# Altium PCB NavMergeBoardR2.PcbDoc
Units mil, origin at the board's own origin, x right, y up, seen from the top; angles counter-clockwise.
Board outline 3460 x 2717 mil, 4 copper layers (Top Layer, Internal Plane 1, Internal Plane 2, Bottom Layer), stack 30.634 mil thick; 103 components, 93 nets, 472 pads, 121 vias.
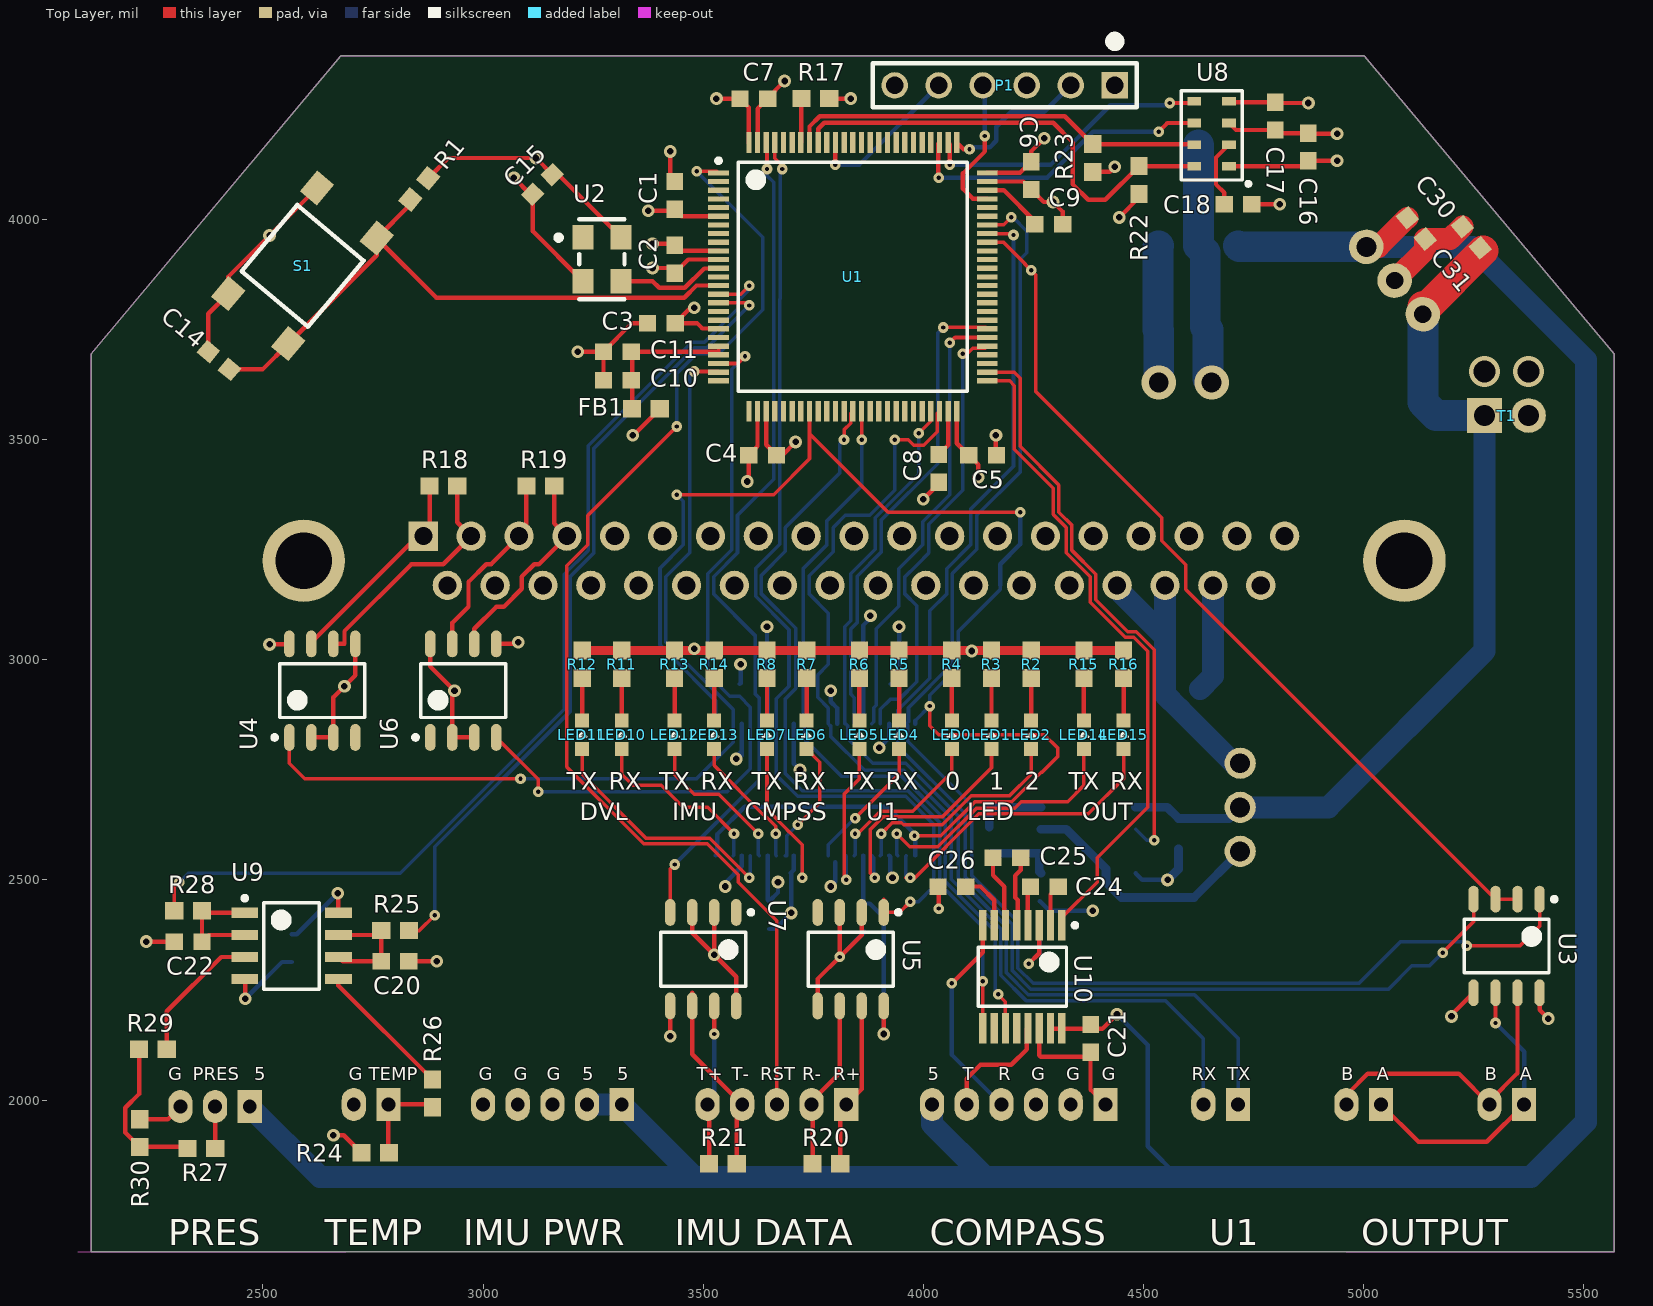
[diagram p0: Top Layer view]
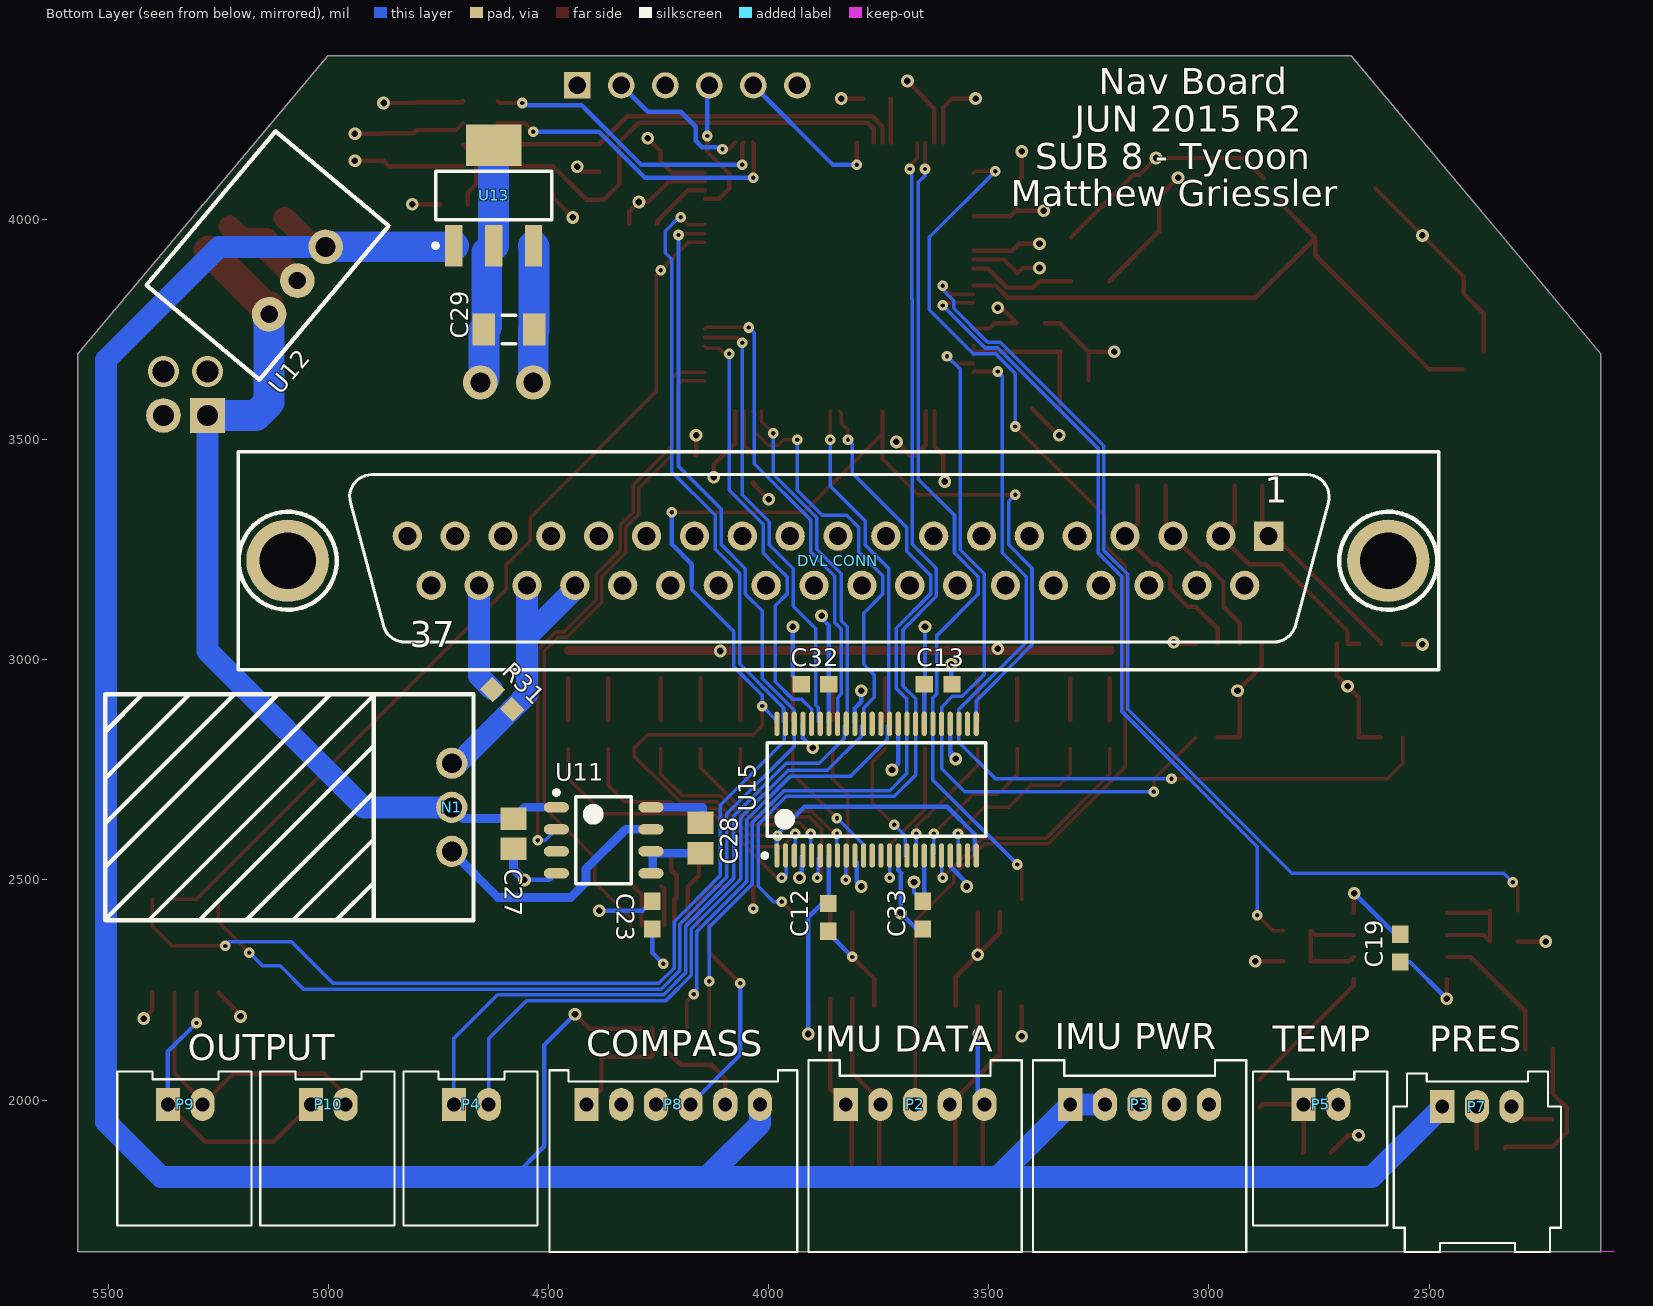
[diagram p1: Bottom Layer view, seen from below]
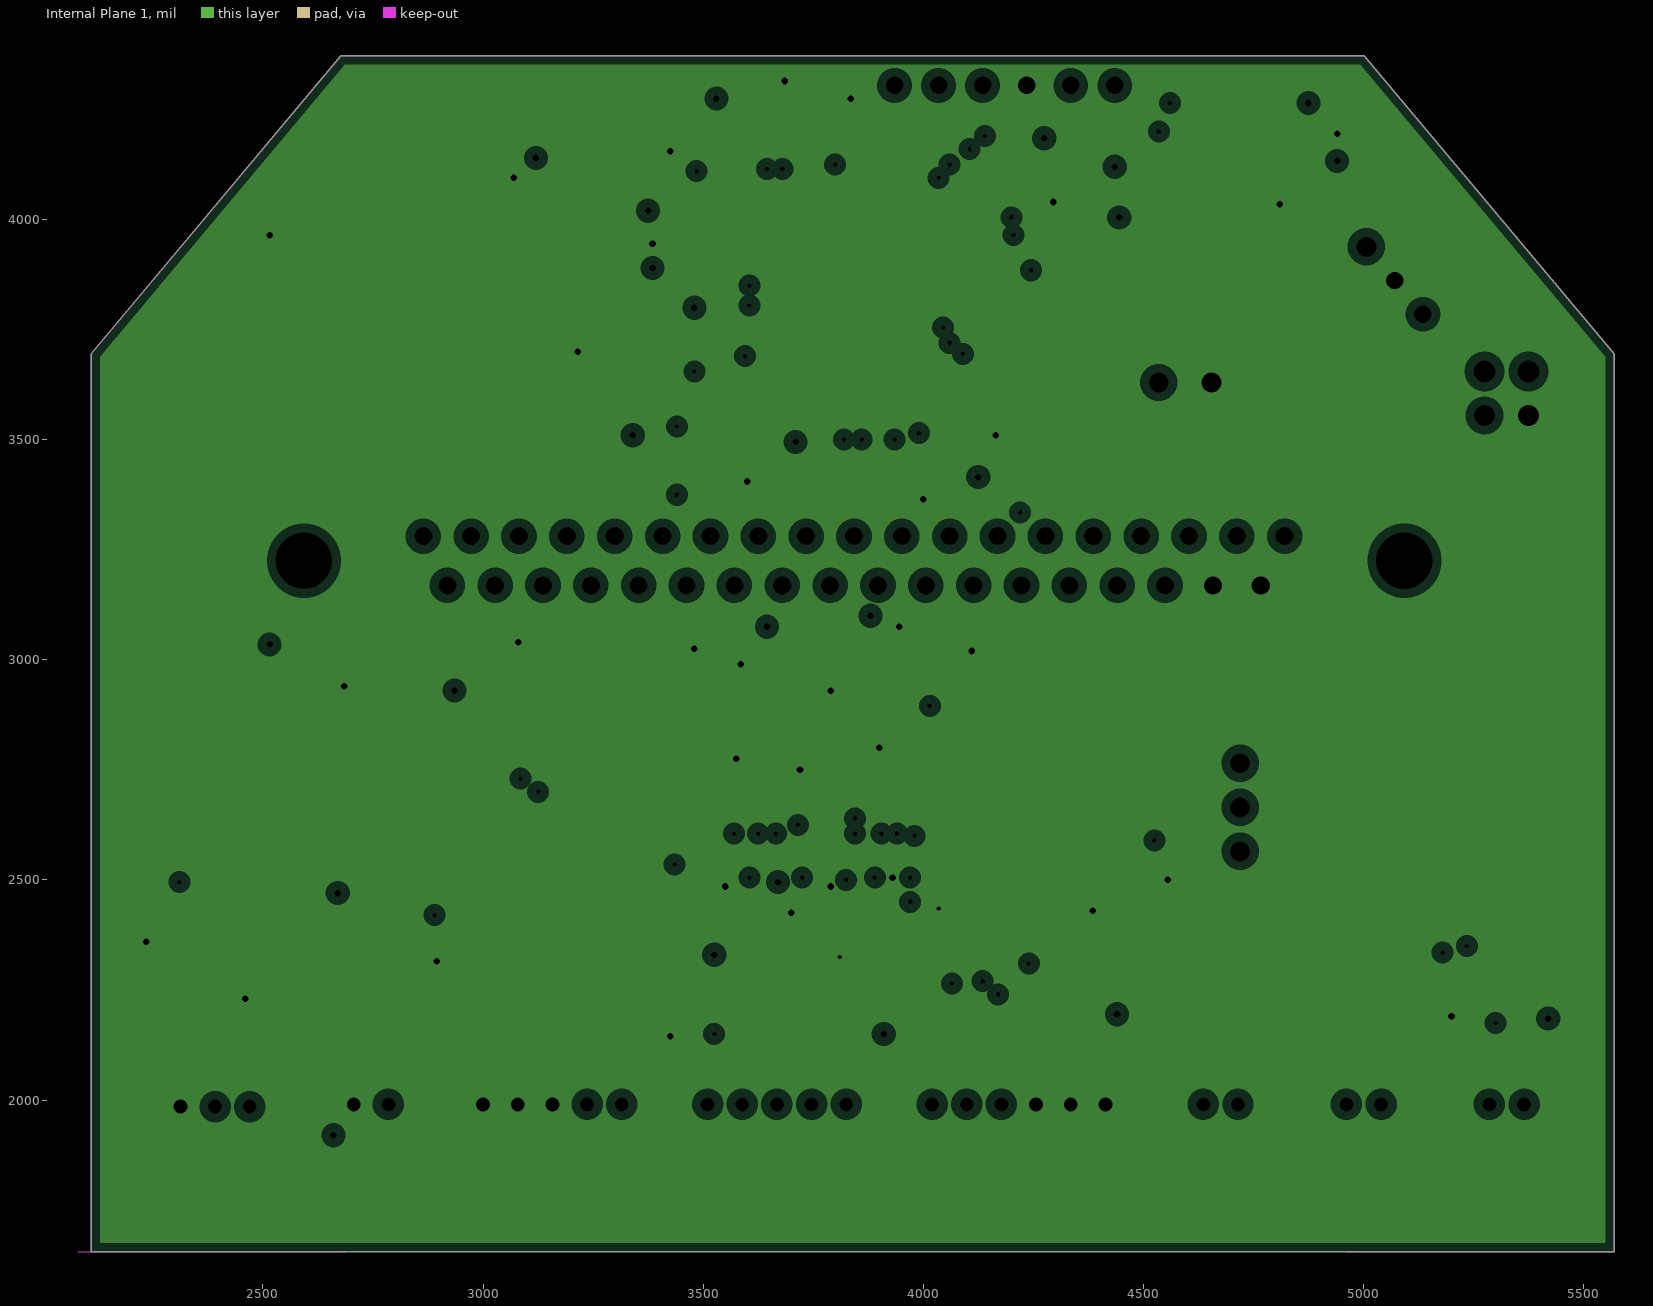
[diagram p2: Internal Plane 1, clearances drawn from the general rule]
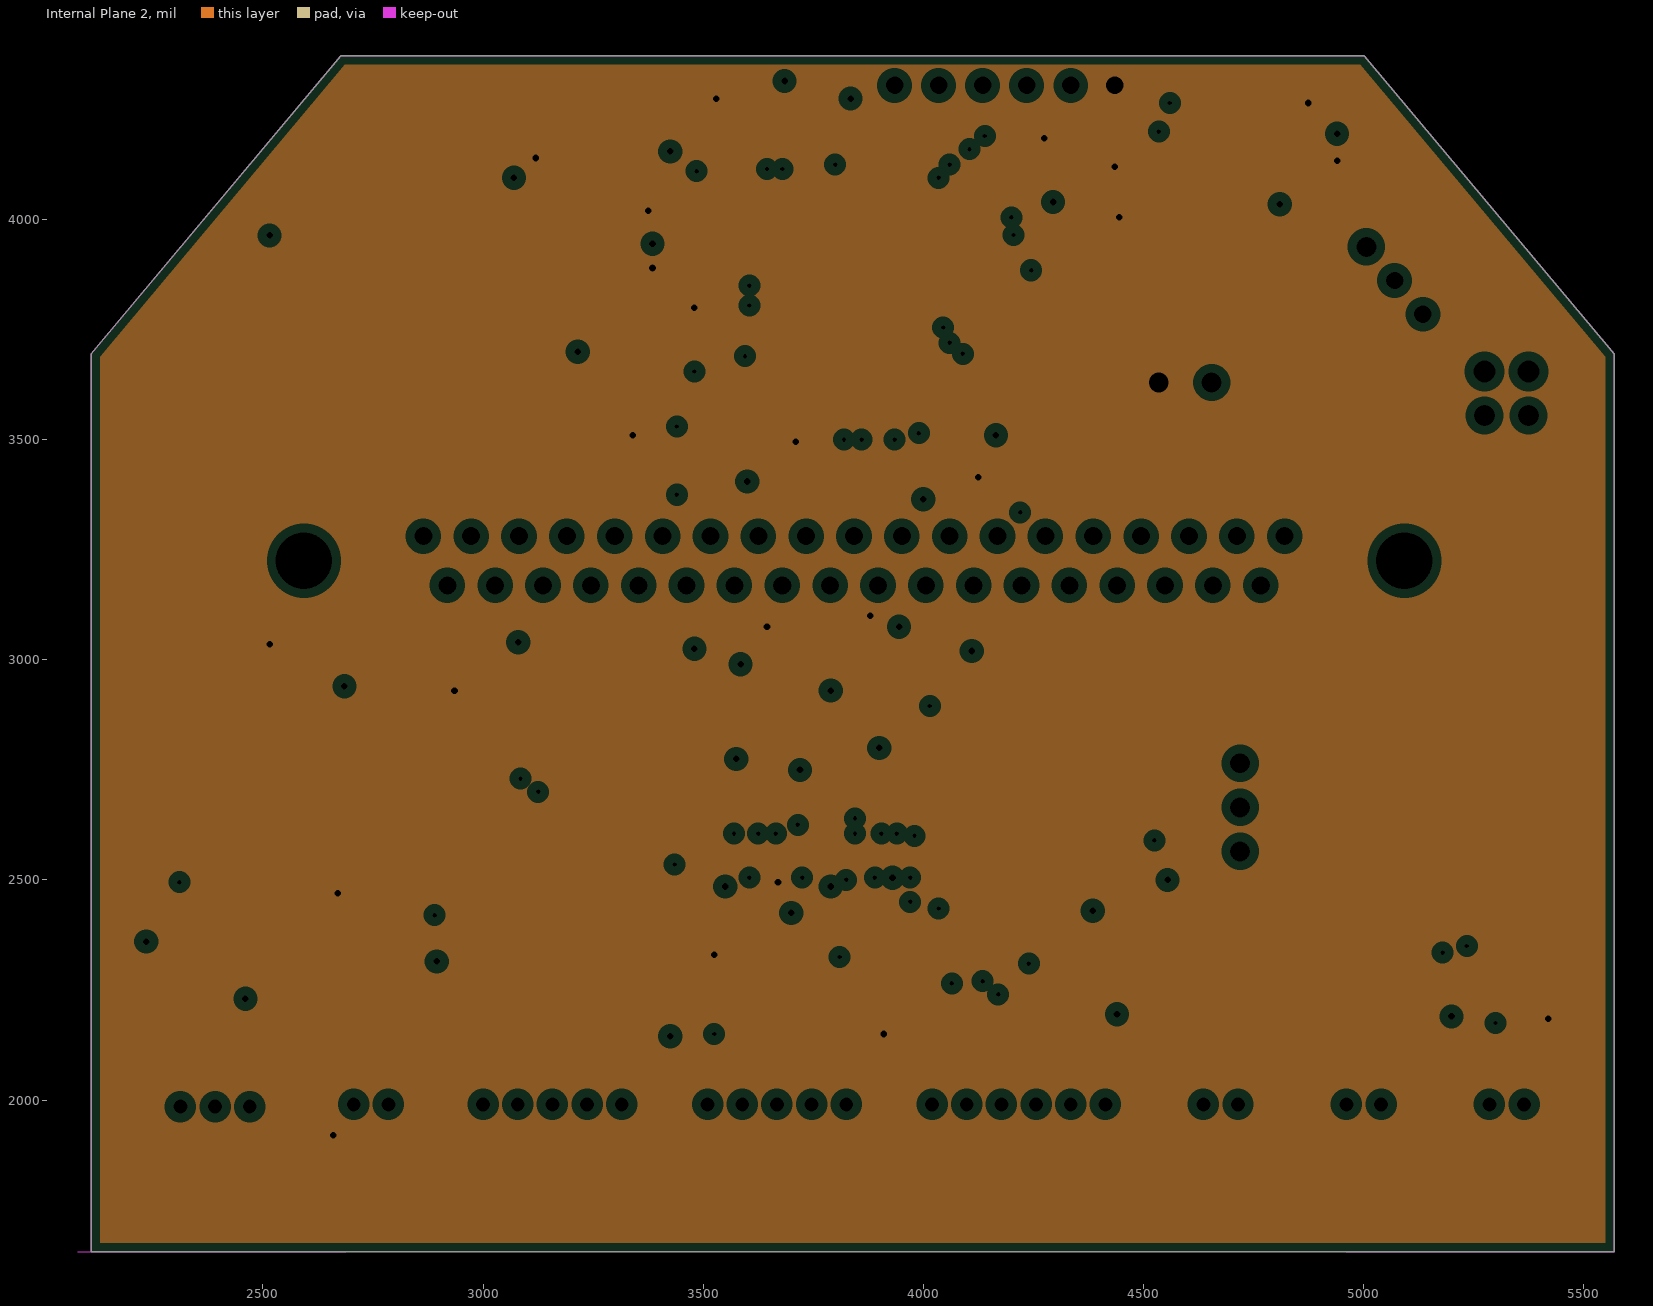
[diagram p3: Internal Plane 2, clearances drawn from the general rule]

## Layer stack, top to bottom
Top Solder: solder mask 0.4, Solder Resist, Dk 3.5
Top Layer: signal copper 1.4
Dielectric 1: core 10, FR-4, Dk 4.2
Internal Plane 1: plane copper 1.417, net GND
Dielectric 3: core 10, Dk 4.2
Internal Plane 2: plane copper 1.417, net 3V3
Dielectric 4: prepreg 5, Dk 4.2
Bottom Layer: signal copper 1.4
Bottom Solder: solder mask 0.4, Solder Resist, Dk 3.5

## Board outline
2109.47,1655.05 2109.47,3695.05 2676.97,4372.05 5001.97,4372.05 5569.47,3695.05 5569.47,1655.05

## Design rules (kind name [scope] priority, off if disabled: settings)
Clearance [All] p1: gap=10 except(5: Track-Track Track-SMDPad SMDPad-SMDPad; 7: Track-Via)
HoleSize [All] p1: absolutevalues=TRUE maxlimit=150 minlimit=10 maxpercent=80.000 minpercent=20.000
MinimumAnnularRing [All] p1: minimumring=7
MinimumSolderMaskSliver [All] p1: minsoldermaskwidth=1
PlaneClearance [All] p1: clearance=20
PlaneConnect [All] p1: planeconnectstyle=Relief reliefexpansion=20 reliefentries=4 reliefconductorwidth=10 reliefairgap=10
PolygonConnect [All] p1: connectstyle=Relief reliefconductorwidth=10 reliefentries=4 polygonreliefangle="90 Angle" airgapwidth=10
RoutingVias [All] p1: holewidth=10 width=22 viastyle="Through Hole" minholewidth=10 minwidth=22 maxholewidth=100 maxwidth=150
SilkToSolderMaskClearance [IsPad] p1: minsilkscreentomaskgap=5 clearancetoexposedcopper=TRUE
SolderMaskExpansion [All] p1: expansion=4
Width [All] p1: maxlimit=150 minlimit=8 preferedwidth=10
25 further rules are at their usual default settings.

## Classes and differential pairs
component class LEDs: C12 C13 C32 C33 LED0 LED1 LED2 LED4 LED5 LED6 LED7 LED10 LED11 LED12 LED13 LED14 LED15 R2 R3 R4 R5 R6 R7 R8 R11 R12 R13 R14 R15 R16 U15
component class NavMergeBoard: C19 C20 C21 C22 C23 C24 C25 C26 "DVL CONN" P2 P3 P4 P5 P7 P8 R18 R19 R20 R21 R24 R25 R26 R27 R28 R29 R30 U4 U5 U6 U7 U9 U10
component class Power: C27 C28 C29 C30 C31 N1 R31 T1 U11 U12 U13
component class CPU: C1 C2 C3 C4 C5 C6 C7 C8 C9 C10 C11 C14 C15 C16 C17 C18 FB1 P1 P9 P10 R1 R17 R22 R23 S1 U1 U2 U3 U8

## Components (designator, comment, footprint, x,y, rotation, side; value= is the part's Value field where it differs from the comment)
C1 "Cap" CAPC0603 3435,4055 r90 top
C2 "Cap" CAPC0603 3435,3910 r90 top
C3 "Cap" CAPC0603 3405,3765 r180 top
C4 "Cap" CAPC0603 3635,3465 r180 top
C5 "Cap" CAPC0603 4135,3465 r0 top
C6 "Cap" CAPC0603 4245,4100 r270 top
C7 "Cap" CAPC0603 3615,4275 r0 top
C8 "Cap" CAPC0603 4035,3435 r270 top
C9 "Cap" CAPC0603 4285,3990 r0 top
C10 "Cap" CAPC0603 3305,3635 r180 top
C11 "Cap" CAPC0603 3305,3700 r180 top
C12 "Cap" CAPC0603 3865,2415 r270 bottom
C13 "Cap" CAPC0603 3615,2945 r180 bottom
C14 "Cap" CAPC0603 2400,3680 r140 top
C15 "Cap" CAPC0603 3135,4080 r225 top
C16 "Cap" CAPC0603 4875,4165 r90 top
C17 "Cap" CAPC0603 4800,4235 r270 top
C18 "Cap" CAPC0603 4715,4035 r0 top
C19 "Cap" CAPC0603 2565,2345 r270 bottom
C20 "Cap" CAPC0603 2800,2315 r0 top
C21 "Cap" CAPC0603 4380,2140 r270 top
C22 "Cap" CAPC0603 2330,2360 r180 top
C23 "Cap" CAPC0603 4265,2420 r90 bottom
C24 "Cap" CAPC0603 4275,2485 r180 top
C25 "Cap" CAPC0603 4190,2550 r180 top
C26 "Cap" CAPC0603 4065,2485 r180 top
C27 "Cap" CAPC0805 4580,2605 r270 bottom
C28 "Cap" CAPC0805 4155,2595 r270 bottom
C29 "Cap" CAPC1206 4590,3750 r0 bottom
C30 "Cap" CAPC0603 5245,3960 r130 top
C31 "Cap" CAPC0603 5120,3980 r310 top
C32 "Cap" CAPC0603 3895,2945 r0 bottom
C33 "Cap" CAPC0603 3650,2420 r270 bottom
"DVL CONN" "DB37" "DSUB37_ FEMALE" 5093,3225 r180 bottom
FB1 "FBead" RES0603 3370,3570 r0 top
LED0 "LED" LED0603 4065,2830 r90 top
LED1 "LED" LED0603 4155,2830 r90 top
LED2 "LED" LED0603 4245,2830 r90 top
LED4 "LED" LED0603 3945,2830 r90 top
LED5 "LED" LED0603 3855,2830 r90 top
LED6 "LED" LED0603 3735,2830 r90 top
LED7 "LED" LED0603 3645,2830 r90 top
LED10 "LED" LED0603 3315,2830 r90 top
LED11 "LED" LED0603 3225,2830 r90 top
LED12 "LED" LED0603 3435,2830 r90 top
LED13 "LED" LED0603 3525,2830 r90 top
LED14 "LED" LED0603 4365,2830 r90 top
LED15 "LED" LED0603 4455,2830 r90 top
N1 "NMOSFET_TO-220" "TO-220AB Heatsink" 4720,2665 r90 bottom
P1 "SWD" SWD_STM32 4435,4305 r270 top
P2 "MOLEX-HDR-1x5-SHERLOCK_RA" "MOLEX-HDR-1X5-SHERLOCK- RA" 3824.96,1990 r0 bottom
P3 "MOLEX-HDR-1x5-SHERLOCK_RA" "MOLEX-HDR-1X5-SHERLOCK- RA" 3314.96,1990 r0 bottom
P4 "2-pin Horz Sherlock" MOLEX-HDR-1X2-SHERLOCK-HORZ 4715,1990 r0 bottom
P5 "2-pin Horz Sherlock" MOLEX-HDR-1X2-SHERLOCK-HORZ 2785,1990 r0 bottom
P7 "3pos RA sherlock connector" MOLEX-HDR-1X3-SHERLOCK-RA 2470,1985 r0 bottom
P8 "Sherlock 1x6 RA" "MOLEX-HDR-1X6-SHERLOCK- RA" 4413.7,1990 r0 bottom
P9 "2-pin Horz Sherlock" MOLEX-HDR-1X2-SHERLOCK-HORZ 5365,1990 r0 bottom
P10 "2-pin Horz Sherlock" MOLEX-HDR-1X2-SHERLOCK-HORZ 5040,1990 r0 bottom
R1 "Res" RES0603 2855,4070 r230 top
R2 "Res" RES0603 4245,2990 r90 top
R3 "Res" RES0603 4155,2990 r90 top
R4 "Res" RES0603 4065,2990 r90 top
R5 "Res" RES0603 3945,2990 r90 top
R6 "Res" RES0603 3855,2990 r90 top
R7 "Res" RES0603 3735,2990 r90 top
R8 "Res" RES0603 3645,2990 r90 top
R11 "Res" RES0603 3315,2990 r90 top
R12 "Res" RES0603 3225,2990 r90 top
R13 "Res" RES0603 3435,2990 r90 top
R14 "Res" RES0603 3525,2990 r90 top
R15 "Res" RES0603 4365,2990 r90 top
R16 "Res" RES0603 4455,2990 r90 top
R17 "Res" RES0603 3755,4275 r0 top
R18 "Res" RES0603 2910,3395 r0 top
R19 "Res" RES0603 3130,3395 r0 top
R20 "Res" RES0603 3780,1855 r180 top
R21 "Res" RES0603 3545,1855 r0 top
R22 "Res" RES0603 4490,4090 r90 top
R23 "Res" RES0603 4385,4140 r90 top
R24 "Res" RES0603 2755,1880 r0 top
R25 "Res" RES0603 2800,2385 r0 top
R26 "Res" RES0603 2885,2015 r90 top
R27 "Res" RES0603 2360,1890 r180 top
R28 "Res" RES0603 2330,2430 r180 top
R29 "Res" RES0603 2250,2115 r0 top
R30 "Res" RES0603 2220,1925 r90 top
R31 "Res" RES0603 4605,2910 r45 bottom
S1 "Button" PTS645xxxxSMTR92 2590,3895 r230 top
T1 "1725656" 1725656 5275,3555 r90 top
U1 "STM32F429VIT6" STM32F429VIT6 3840,3870 r0 top
U2 "25MHz" 636L3C 3270,3910 r270 top
U3 "SP3485" SP3485 5325,2350 r270 top
U4 "SP3485" SP3485 2635,2930 r90 top
U5 "SP3485" SP3485 3835,2320 r270 top
U6 "SP3485" SP3485 2955,2930 r90 top
U7 "SP3485" SP3485 3500,2320 r270 top
U8 "MPL3115A2" MPL3115A2 4655,4195 r180 top
U9 "OPA2340" OPA2340 2565,2350 r0 top
U10 "SP3220E" SP3220ECY-L/TR 4225,2280 r270 top
U11 "MIC5021" MIC5021 4375,2590 r180 bottom
U12 "R-78C5.0-1.0" R-78C5.0-1.0 5135,3785 r130 bottom
U13 "3.3V LDO Reg" SOT23-4n 4625,4055 r90 bottom
U15 "74AC16244DGGR" 74AC16244DGGR 3755,2705 r90 bottom

## Footprints (in the part's own frame and the unit in brackets; to place one, negate y for a bottom-side part, rotate by r counter-clockwise, add the part's x,y. Pads: shape width x height; smd on the part's side, far side on the other; paste and mask are expansions set on the pad)
74AC16244DGGR [mm] "TSSOP, 48-Leads, Body 12.50x6.10mm, Pitch 0.50mm, IPC Medium Density"
  oval 1.4x0.3 smd: 1(-3.8,5.75) 2(-3.8,5.25) 3(-3.8,4.75) 5(-3.8,3.75) 6(-3.8,3.25) 8(-3.8,2.25) 9(-3.8,1.75) 11(-3.8,0.75) 12(-3.8,0.25) 13(-3.8,-0.25) 14(-3.8,-0.75) 16(-3.8,-1.75) 17(-3.8,-2.25) 19(-3.8,-3.25) 20(-3.8,-3.75) 22(-3.8,-4.75) 23(-3.8,-5.25) 24(-3.8,-5.75) 25(3.8,-5.75) 26(3.8,-5.25) 27(3.8,-4.75) 29(3.8,-3.75) 30(3.8,-3.25) 32(3.8,-2.25) 33(3.8,-1.75) 35(3.8,-0.75) 36(3.8,-0.25) 37(3.8,0.25) 38(3.8,0.75) 40(3.8,1.75) 41(3.8,2.25) 43(3.8,3.25) 44(3.8,3.75) 46(3.8,4.75) 47(3.8,5.25) 48(3.8,5.75) GND(-3.8,-4.25) GND(-3.8,-1.25) GND(-3.8,1.25) GND(-3.8,4.25) GND(3.8,-4.25) GND(3.8,-1.25) GND(3.8,1.25) GND(3.8,4.25) VCC(-3.8,-2.75) VCC(-3.8,2.75) VCC(3.8,-2.75) VCC(3.8,2.75)
  silkscreen extent -3.92,-6.3 2.7,6.58, body extent -3.1,-6.3 3.1,6.3, height 1.2
636L3C [mm]
  rect 1.4x1.2 smd: 1(-1.27,-1.1) 2(1.27,-1.1) 3(1.27,1.1) 4(-1.27,1.1)
  silkscreen extent -2.3,-2.65 2.3,1.3, body extent -2.5,-1.6 2.5,1.6, height 2
1725656 [mm] "CONN TERM BLOCK 2.54MM 2POS"
  rect 2x2 hole 1.2: 1(0,0)
  round 2 hole 1.2: 2(0,-2.54)
CAPC0603 [mm] "Chip Capacitor, 2-Leads, Body 1.60x0.80mm, IPC Medium Density"
  rect 1x0.95 smd: 1(-0.8,0) 2(0.8,0)
  body extent -0.88,-0.48 0.87,0.48, height 0.8
CAPC0805 [mm] "Chip Capacitor, 2-Leads, Body 2.01x1.25mm, IPC Medium Density"
  rect 1.3x1.5 smd: 1(-0.875,0) 2(0.875,0)
  body extent -1.1,-0.72 1.11,0.72, height 1.8
CAPC1206 [mm] "Chip Capacitor, 2-Leads, Body 3.20x1.60mm, IPC Medium Density"
  rect 1.3x1.85 smd: 1(-1.45,0) 2(1.45,0)
  silkscreen extent -0.4,-0.82 0.4,0.82, body extent -1.7,-0.9 1.7,0.9, height 1.8
"DSUB37_ FEMALE" [mm] "Connector; D Subminiature; 37 Position; Straight Female"
  round 4.76 hole 3.26: 0(0,0) 0(63.506,0)
  rect 1.69x1.69 hole 1.041: 1(56.607,1.42)
  round 1.69 hole 1.041: 2(53.846,1.42) 3(51.085,1.42) 4(48.324,1.42) 5(45.563,1.42) 6(42.802,1.42) 7(40.041,1.42) 8(37.28,1.42) 9(34.519,1.42) 10(31.758,1.42) 11(28.997,1.42) 12(26.236,1.42) 13(23.475,1.42) 14(20.714,1.42) 15(17.953,1.42) 16(15.192,1.42) 17(12.431,1.42) 18(9.67,1.42) 19(6.909,1.42) 20(55.227,-1.42) 21(52.466,-1.42) 22(49.705,-1.42) 23(46.944,-1.42) 24(44.183,-1.42) 25(41.422,-1.42) 26(38.661,-1.42) 27(35.9,-1.42) 28(33.139,-1.42) 29(30.378,-1.42) 30(27.617,-1.42) 31(24.856,-1.42) 32(22.095,-1.42) 33(19.334,-1.42) 34(16.573,-1.42) 35(13.812,-1.42) 36(11.051,-1.42) 37(8.29,-1.42)
  silkscreen extent -2.86,-6.3 66.43,6.3, body extent -2.85,-6.3 66.45,6.25, height 11.84
LED0603 [mm] "Chip LED, 2-Leads, Body 1.60x0.80mm, IPC Medium Density"
  rect 0.8x0.8 smd: A(-0.825,0) C(0.825,0)
  silkscreen extent -0.13,-0.25 0.12,0.25, body extent -0.88,-0.48 0.87,0.47, height 0.8
MIC5021 [mm] "SOIC, 8-Leads, Body 4.90x3.90mm, Pitch 1.27mm, IPC Medium Density"
  oval 1.45x0.6 smd: 1(-2.725,1.905) 2(-2.725,0.635) 3(-2.725,-0.635) 4(-2.725,-1.905) 5(2.725,-1.905) 6(2.725,-0.635) 7(2.725,0.635) 8(2.725,1.905)
  silkscreen extent -2.85,-2.5 1.6,2.88, body extent -2,-2.5 2,2.5, height 1.63
MOLEX-HDR-1X2-SHERLOCK-HORZ [mm]
  rect 1.397x1.905 hole 0.8: 1(0,0)
  oval 1.397x1.905 hole 0.8: 2(-2,0)
  silkscreen extent -4.83,-1.91 2.92,6.98, body extent -4.83,-1.91 2.87,8.59, height 5.54
MOLEX-HDR-1X3-SHERLOCK-RA [mm]
  rect 1.397x1.905 hole 0.8: 1(0,0)
  oval 1.397x1.905 hole 0.8: 2(-2,0) 3(-4,0)
  silkscreen extent -6.86,-2.03 2.79,8.38, body extent -6.88,-1.99 2.82,8.51, height 5.75
"MOLEX-HDR-1X5-SHERLOCK- RA" [mm]
  rect 1.397x1.905 hole 0.8: 1(0,0)
  oval 1.397x1.905 hole 0.8: 2(-2,0) 3(-4,0) 4(-6,0) 5(-8,0)
  silkscreen extent -10.16,-2.55 2.15,8.51, body extent -10.16,-1.96 2.14,8.54, height 5.54
"MOLEX-HDR-1X6-SHERLOCK- RA" [mm]
  rect 1.397x1.905 hole 0.8: 1(0,0)
  oval 1.397x1.905 hole 0.8: 2(-2,0) 3(-4,0) 4(-6,0) 5(-8,0) 6(-10,0)
  silkscreen extent -12.15,-1.97 2.15,8.51, body extent -12.15,-1.95 2.15,8.55, height 5.54
MPL3115A2 [mm] "LGA, 8-Leads, Body 2.65x4.65mmx1.20mm, Pitch 1.00mm"
  rect 0.8x0.5 smd: 1(-1,1.875) 2(-1,0.625) 3(-1,-0.625) 4(-1,-1.875) 5(1,-1.875) 6(1,-0.625) 7(1,0.625) 8(1,1.875)
  silkscreen extent -2.22,-2.49 1.76,2.99, body extent -1.33,-2.32 1.32,2.32, height 1.2
OPA2340 [mm] "SOIC, 8-Leads, Body 4.90x3.90mm, Pitch 1.27mm, IPC Medium Density"
  rect 1.55x0.6 smd: 1(-2.7,1.905) 2(-2.7,0.635) 3(-2.7,-0.635) 4(-2.7,-1.905) 5(2.7,-1.905) 6(2.7,-0.635) 7(2.7,0.635) 8(2.7,1.905)
  silkscreen extent -2.82,-2.5 1.6,2.88, body extent -2,-2.5 2,2.5, height 1.75
PTS645xxxxSMTR92 [mm] "PTS645 Series SMT 6 mm Tactile Switch"
  rect 1.555x1.3 smd: A(-3.975,2.25) A(3.975,2.25) B(-3.975,-2.25) B(3.975,-2.25)
  silkscreen extent -2.5,-2.5 2.5,2.5, body extent -3,-3 3,3, height 4.5
R-78C5.0-1.0 [mm] "CONV DC/DC 1A 5V OUT SIP VERT"
  round 2 hole 1: 1(0,0) 2(2.54,0)
  round 2 hole 1.15: 3(5.08,0)
  silkscreen extent -3.26,-2 8.34,6.5, body extent -3.2,-1.9 8.3,6.5, height 10.8
RES0603 [mm] "Chip Resistor, 2-Leads, Body 1.60x0.80mm, IPC Medium Density"
  rect 1.05x1 smd: 1(-0.8,0) 2(0.8,0)
  body extent -0.88,-0.48 0.87,0.47, height 0.8
SOT23-4n [mm] "SOT223, 4-Leads, Body 6.50x7.00mm (avg), Pitch 2.30mm, IPC Medium Density"
  rect 2.4x1 smd: 1(-2.9,2.3) 2(-2.9,0) 3(-2.9,-2.3)
  rect 2.4x3.2 smd: 4(2.9,0)
  silkscreen extent -3.02,-3.35 1.4,3.48, body extent -1.85,-3.35 1.85,3.35, height 1.7
SP3220ECY-L/TR [mm] "TSOP, 16-Leads, Body 5.00x4.40mm, Pitch 0.65mm, IPC Medium Density"
  rect 1.78x0.42 smd: 1(-2.97,2.275) 2(-2.97,1.625) 3(-2.97,0.975) 4(-2.97,0.325) 5(-2.97,-0.325) 6(-2.97,-0.975) 7(-2.97,-1.625) 8(-2.97,-2.275) 9(2.97,-2.275) 10(2.97,-1.625) 11(2.97,-0.975) 12(2.97,-0.325) 13(2.97,0.325) 14(2.97,0.975) 15(2.97,1.625) 16(2.97,2.275)
  silkscreen extent -3.09,-2.55 1.7,3.16, body extent -2.25,-2.55 2.25,2.55, height 1.2
SP3485 [mm] "SOIC, 8-Leads, Body 4.90x3.90mm, Pitch 1.27mm, IPC Medium Density"
  oval 1.55x0.6 smd: 1(-2.7,1.905) 2(-2.7,0.635) 3(-2.7,-0.635) 4(-2.7,-1.905) 5(2.7,-1.905) 6(2.7,-0.635) 7(2.7,0.635) 8(2.7,1.905)
  silkscreen extent -2.82,-2.45 1.55,2.88, body extent -1.95,-2.45 1.95,2.45, height 1.75
STM32F429VIT6 [mm] "TSQFP, 100-Leads, Body 14.00x14.00mm, Pitch 0.50mm, IPC Medium Density"
  rect 1.2x0.3 smd: 1(-7.75,6) 2(-7.75,5.5) 3(-7.75,5) 4(-7.75,4.5) 5(-7.75,4) 6(-7.75,3.5) 7(-7.75,3) 8(-7.75,2.5) 9(-7.75,2) 10(-7.75,1.5) 11(-7.75,1) 12(-7.75,0.5) 13(-7.75,0) 14(-7.75,-0.5) 15(-7.75,-1) 16(-7.75,-1.5) 17(-7.75,-2) 18(-7.75,-2.5) 19(-7.75,-3) 20(-7.75,-3.5) 21(-7.75,-4) 22(-7.75,-4.5) 23(-7.75,-5) 24(-7.75,-5.5) 25(-7.75,-6) 51(7.75,-6) 52(7.75,-5.5) 53(7.75,-5) 54(7.75,-4.5) 55(7.75,-4) 56(7.75,-3.5) 57(7.75,-3) 58(7.75,-2.5) 59(7.75,-2) 60(7.75,-1.5) 61(7.75,-1) 62(7.75,-0.5) 63(7.75,0) 64(7.75,0.5) 65(7.75,1) 66(7.75,1.5) 67(7.75,2) 68(7.75,2.5) 69(7.75,3) 70(7.75,3.5) 71(7.75,4) 72(7.75,4.5) 73(7.75,5) 74(7.75,5.5) 75(7.75,6)
  rect 0.3x1.2 smd: 26(-6,-7.75) 27(-5.5,-7.75) 28(-5,-7.75) 29(-4.5,-7.75) 30(-4,-7.75) 31(-3.5,-7.75) 32(-3,-7.75) 33(-2.5,-7.75) 34(-2,-7.75) 35(-1.5,-7.75) 36(-1,-7.75) 37(-0.5,-7.75) 38(0,-7.75) 39(0.5,-7.75) 40(1,-7.75) 41(1.5,-7.75) 42(2,-7.75) 43(2.5,-7.75) 44(3,-7.75) 45(3.5,-7.75) 46(4,-7.75) 47(4.5,-7.75) 48(5,-7.75) 49(5.5,-7.75) 50(6,-7.75) 76(6,7.75) 77(5.5,7.75) 78(5,7.75) 79(4.5,7.75) 80(4,7.75) 81(3.5,7.75) 82(3,7.75) 83(2.5,7.75) 84(2,7.75) 85(1.5,7.75) 86(1,7.75) 87(0.5,7.75) 88(0,7.75) 89(-0.5,7.75) 90(-1,7.75) 91(-1.5,7.75) 92(-2,7.75) 93(-2.5,7.75) 94(-3,7.75) 95(-3.5,7.75) 96(-4,7.75) 97(-4.5,7.75) 98(-5,7.75) 99(-5.5,7.75) 100(-6,7.75)
  silkscreen extent -7.87,-6.6 6.6,6.82, body extent -7,-7 7,7, height 1.6
SWD_STM32 [mil] "SWD connector matching the pinout on STM Discovery Boards"
  rect 60x60 hole 39.37: 1(0,0)
  round 60 hole 39.37: 2(0,-100) 3(0,-200) 4(0,-300) 5(0,-400) 6(0,-500)
  silkscreen extent -110,-550 50,50
"TO-220AB Heatsink" [mm] "HEXFET Power MOSFET w/ Heat Sink"
  round 1.8 hole 1.15: D(0,0) G(-2.54,0) S(2.54,0)
  silkscreen extent -6.53,-1.25 6.52,20, body extent -6.44,-0.15 6.36,19.9, height 12.7

## Part data
"DVL CONN": library part DVLCONN, "DVL Connector using DSUB37"
FB1: "Ferrite Bead"
N1: "NMOSFET_TO-220-Template"
P1: library part SWD_STM32, "SWD connector matching the pinout on STM Discovery Boards"
P2 P3: "Header, Molex, 2mm Pitch Sherlock Header, Single Row, Vertical, 5 Circuits, Length 3.3mm, 0353620550"
P4 P5 P9 P10: library part MOLEX-HDR-1x2-SHERLOCK_RA, "Header, Molex, 2mm Pitch Sherlock Header, Single Row, Horizontal, 2 Circuits, Length 3.3mm,  0353630260"
P7: library part MOLEX-HDR-1x3-SHERLOCK_RA, "Header, Molex, 2mm Pitch Sherlock Header, Single Row, Right Angle 3 Circuits, Length 3.3mm"
P8: library part MOLEX-HDR-1x6-SHERLOCK_RA, "CONN HEADER 6POS 2MM R/A TIN"
S1: "SPST Button"
T1: "CONN TERM BLOCK 2.54MM 2POS"
U1: "IC MCU ARM 2MB FLASH 100LQFP"
U2: library part 636L3C, "HCMOS/TTL Clock Oscillator"
U3 U4 U5 U6 U7: "IC TXRX RS485 HALF DUPLEX 8NSOIC"
U8: "IC ALTIMETER I2C VERSION 8LGA"
U9: "IC OPAMP GP 5.5MHZ RRO 8SOIC"
U10: "IC DVR/RCVR RS232 ESD 16TSSOP"
U11: "IC DRIVER MOSFET HISIDE HS 8SOIC"
U12: "CONV DC/DC 1A 5V OUT SIP VERT"
U13: library part LM3940IMPX-3.3, "IC REG LDO 3.3V 1A SOT223"
U15: "IC BUFF/DVR TRI-ST 16BIT 48TSSOP"

## Via types
v1: diameter 24, hole 10, Top Layer to Bottom Layer, tented both sides, 59 vias
v2: diameter 29, hole 15, Top Layer to Bottom Layer, tented both sides, 58 vias
v3: diameter 78, hole 45, Top Layer to Bottom Layer, tented both sides, 2 vias
v4: diameter 70, hole 50, Top Layer to Bottom Layer, tented both sides, 2 vias

## Nets (pads, with @x,y where several pads share a name; then routed paths per layer and width w, separated by ;. In a path a pad name is that pad's centre, name@x,y a point inside that pad or via, vN(x,y) a via of type N, cw(c..) or ccw(c..) an arc to the next point about the centre after c; other vN are vias at no path point)
3V3: C1.1 C2.1 C3.1 C4.1 C5.1 C6.1 C7.1 C12.1 C13.1 C15.1 C16.1 C17.1 C19.1 C29.1 C32.1 C33.1 FB1.2 P1.1 R1.1 R22.1 R23.1 R24.1 U1.6 U1.11 U1.19 U1.28 U1.50 U1.75 U1.100 U2.4 U3.8 U4.8 U5.8 U6.2 U6.3 U6.8 U7.2 U7.3 U7.8 U8.1 U8.4 U9.8 U13.3 U15.VCC | length 4805.8
  Top Layer w10: v2(2515,3035) 2558.7,3035 U4.8 ; v2(2660,1920) 2683.5,1920 R24.1 ; v2(2670,2470) 2671.3,2468.7 U9.8 ; R1.1 2921.12,4140 v2(3120,4140) 3157.27,4102.73 C15.1 3171.04,4102.27 U2.4 ; U6.8 2880,2985 v2(2935,2930) 2930,2925 U6.2 U6.3 ; v2(3340,3510) 3341.5,3510 FB1.2 ; v2(3375,4020) 3431.5,4020 C1.1 3450.71,4007.8 U1.6 ; v2(3385,3890) 3423.5,3890 C2.1 3465.87,3909.37 U1.11 ; U7.3 3475,2380 v2(3525,2330) ; v2(3480,3800) 3471.5,3800 C3.1 3485.93,3765 3498.26,3752.67 3534.1,3752.67 U1.19 ; U7.2 v2(3525,2330) ; v2(3530,4275) C7.1 3603.78,4254.72 U1.100 ; U7.8 3575,2280 v2(3525,2330) ; U1.28 3643.15,3488.35 C4.1 3680,3465 v2(3710,3495) ; v2(3910,2150) U5.8 ; U1.50 4076.22,3492.28 C5.1 4125,3443.5 v2(4125,3415) ; U1.75 4219.72,4106.22 C6.1 4245,4155 v2(4275,4185) ; R23.1 4423.5,4108.5 v2(4435,4120) ; v2(4445,4005) 4490,4050 R22.1 ; U8.1 4862.68,4121.18 C16.1 v2@4938.5,4133.5 ; U8.4 4696.69,4266.5 C17.1 4801.5,4265 v2(4875,4265) ; U3.8 5400,2205 v2(5420,2185)
  Bottom Layer w10: C19.1 2576.5,2376.5 v2(2670,2470) ; v2(3645,3075) 3645,2946.5 C13.1 ; U15.VCC@3646.73,2555.39 3646.73,2454.76 C33.1 3670,2471.5 v2(3670,2495) ; U15.VCC@3646.73,2854.61 C13.1@3646.73,2944.76 ; U15.VCC@3863.27,2555.39 3863.27,2448.23 C12.1 3878.5,2446.5 3910,2415 v2(3910,2150) ; U15.VCC@3863.27,2854.61 3863.27,3077.98 3880,3094.71 v2(3880,3100)
  Bottom Layer w70: U13.3 4532.91,3939.29 C29.1 4535,3747.91 v3(4535,3630)
  other v2: 4940,4133.5
3V3A: C10.1 C11.1 FB1.1 U1.21 U1.22 | length 351.9
  Top Layer w10: FB1.1 3338.5,3697.99 C11.1 3527.72,3700 U1.22 U1.21
5V: C21.1 C31.1 P3.1 P3.2 P7.1 P8.6 U10.15 U10.16 U12.3 U13.1 | length 7022.3
  Top Layer w10: U10.15 4290.55,2161.5 4380,2161.5 4406.5,2161.5 v2(4440,2195)
  Top Layer w50: U12.3 5033.84,3938.21 C31.1
  Bottom Layer w10: v2(4440,2195) 4510,2125 4510,1895 4580,1825
  Bottom Layer w50: P7.1 2630,1825 3479.96,1825 ; P3.2 P3.1 3479.96,1825 ; P8.6 4020,1945 4140,1825 ; U12.3 5248.21,3938.21 5505,3681.42 5505,1950 5380,1825 4580,1825 4140,1825 ; 3479.96,1825 4140,1825
  Bottom Layer w70: U13.1 4718.17,3938.21 U12.3
/LED_ENABLE: U1.33 U15.1 U15.24 U15.25 U15.48 | length 3550.5
  Top Layer w8: v1(3440,3375) 3660,3375 3741.57,3456.57 3741.57,3513.43 ; U1.33 3741.57,3513.43 ; v1(3980,2600) 4039.44,2600 4117.44,2678 4201.38,2678 4268.38,2745 4269.8,2745 4305,2780.2 4305,2800 4275,2830 4035,2830 4015,2850 v1(4015,2895) ; v1(4220,3335) 3920,3335 3741.57,3513.43
  Bottom Layer w8: v1(3440,3375) 3455.14,3359.86 3455.14,3261.33 3401.96,3208.14 3401.96,3034.66 3425.2,3011.41 3425.2,3010 3528.62,2906.58 U15.25 ; U15.48@3981.38,2861.38 v1(4015,2895) 4015,2919.89 4080,2984.89 4080,3065 4174.86,3159.86 4174.86,3170
  Bottom Layer w10: U15.24 3532.4,2559.17 3532.4,2604.17 3594.23,2666 3919,2666 3981.38,2603.62 U15.1 ; U15.48 U15.48@3981.38,2861.38 ; 4174.86,3170 4174.86,3217.36 4220,3262.5 v1(4220,3335)
CLK: U1.12 U2.3 | length 246.3
  Top Layer w10: U2.3 3385,3860 3400,3845 3458.27,3845 3502.17,3888.91 3534.1,3888.91 U1.12
COMPASS_RX_232: P8.4 U10.8 | length 482.7
  Top Layer w10: v1(4065,2265) 4135.43,2335.43 U10.8
  Bottom Layer w10: v1(4065,2265) 4065,2102.48 P8.4
COMPASS_RX_EN: U1.51 U10.1 | length 1510.3
  Top Layer w8: U1.51 4196.22,3633.78 4207,3623 4207,3478 4295,3390 4295,3330.23 4324.75,3300.48 4324.75,3243.02 4379.1,3188.67 4379.1,3130.9 4458.83,3051.17 4478.41,3051.17 4510,3019.58 4510,2665 4395,2550 4395,2495 4314.57,2414.57 U10.1
COMPASS_RX_TTL: U1.38 U10.9 U15.33 | length 1856.8
  Top Layer w8: v1(3820,3500) 3820,3522.31 3835.22,3537.53 3835.22,3560.1 U1.38 ; v1(4135,2270) 4135,2163.5 U10.9
  Bottom Layer w8: v1(3820,3500) 3810.61,3490.61 3810.61,3424.39 3686.71,3300.48 3686.71,3246.71 3632.36,3192.36 3632.36,3149.52 3710,3071.87 3710,2935 3686.1,2911.1 U15.33 3686.1,2741.74 3725,2702.85 3965.38,2702.85 4037,2631.23 4037,2491.08 4135,2393.08 v1(4135,2270)
COMPASS_RX_TTL_BUF: LED6.A U15.16 | length 289.5
  Top Layer w8: v1(3715,2625) 3765,2675 3765,2767.52 LED6.A
  Bottom Layer w8: U15.16 3690,2555.39 3690,2600 v1(3715,2625)
COMPASS_TX_232: P8.5 U10.13 | length 271.7
  Top Layer w10: P8.5 4098.74,2048.74 4130,2080 4200,2080 4235.47,2115.47 4235.47,2160.75 U10.13
COMPASS_TX_TTL: U1.39 U10.11 U15.35 | length 1728.7
  Top Layer w8: U1.39 3860,3564.57 v1(3860,3500) ; v1(4170,2240) 4186.61,2223.39 U10.11
  Bottom Layer w8: v1(3860,3500) 3860,3395 3781.24,3316.24 3781.24,3261.33 3726.89,3206.98 3726.89,2856.03 U15.35 3730.25,2849.83 3730.25,2819.75 3814,2736 3950.62,2736 4050,2636.62 4050,2496.46 4163,2383.46 4163,2247 v1(4170,2240)
COMPASS_TX_TTL_BUF: LED7.A U15.14 | length 376.5
  Top Layer w8: LED7.A 3645,2660.36 3690,2615.36 3690,2614.64 3704.64,2600 3705,2600 3725,2580 v1(3725,2505)
  Bottom Layer w8: v1(3725,2505) 3725,2554.92 U15.14
DM+: P9.1 P10.1 U3.6 | length 676
  Top Layer w10: P10.1 5125,1905 5280,1905 P9.1 ; v1(5300,2175) U3.6
  Bottom Layer w10: v1(5300,2175) 5365,2110 P9.1
DM-: P9.2 P10.2 U3.7 | length 675.5
  Top Layer w10: P10.2 4965,1993.74 4965,2015 5010,2060 5216.26,2060 P9.2 5286.26,1997.47 5350,2061.21 U3.7
DM_RX: U1.69 U3.1 U15.47 | length 3324.9
  Top Layer w8: U1.69 4183.11,3988.11 v1(4200,4005) ; v1(5235,2350) 5355,2350 5400,2395 U3.1
  Bottom Layer w8: v1(4200,4005) 4203.89,4005 4235,3973.89 4235,3925 4220,3910 4220,3426.66 4121.51,3328.17 4121.51,3251.51 4066,3196 4066,2990.69 3966.47,2891.17 3966.47,2859.39 U15.47 3965,2851.3 3965,2815 4110,2670 4110,2510 4215,2405 4215,2299.64 4249.64,2265 4990,2265 5085,2360 5225,2360 v1(5235,2350)
DM_RX_BUF: LED15.A U15.2 | length 706.8
  Top Layer w8: v1@3960,2505 3981.21,2505 4126.21,2650 4375,2650 4455,2730 LED15.A
  Bottom Layer w8: v1@3960,2505 3960,2553.7 U15.2
  other v1: 3970,2505
DM_TX: U1.68 U3.4 U15.46 | length 3128.8
  Top Layer w8: U1.68 4201.57,3968.43 v1(4205,3965) ; v1(5180,2335) 5250,2405 U3.4
  Bottom Layer w8: v1(4205,3965) 4205,3440 4107.35,3342.35 4107.35,3261.33 4053,3206.98 4053,3149.52 4015,3111.52 4015,2958.08 3942.01,2885.09 U15.46 3942.01,2802.99 4095,2650 4095,2506.62 4202,2399.62 4202,2294.26 4244.26,2252 5057,2252 5110,2305 5150,2305 v1(5180,2335)
DM_TX_BUF: LED14.A U15.3 | length 628.6
  Top Layer w8: v1(3940,2605) 3940,2604.64 3969.64,2575 4032.83,2575 4120.83,2663 4207.6,2663 4222.6,2678 4328,2678 4365,2715 LED14.A
  Bottom Layer w8: v1(3940,2605) 3940,2557.4 U15.3
DM_W/R: U1.67 U3.2 U3.3 | length 2042.6
  Top Layer w8: U1.67 4182.37,3948.74 4231.11,3900 4231.11,3898.89 v1(4245,3885) 4255,3875 4255,3610 4542.15,3322.85 4542.15,3270.71 4596.5,3216.36 4596.5,3159.8 U3.3 U3.2
DVL_PWR: "DVL CONN.34" "DVL CONN.35" N1.S R31.1 | length 645
  Bottom Layer w50: 4440.53,3169.09 4440.53,3161.13 4549.23,3052.43 ; 4549.23,3169.09 4549.23,3052.43 ; N1.S 4705.46,2765 R31.1 4549.23,2921.23 4549.23,3052.43
DVL_PWR_SW: U1.52 U11.2 | length 1321.3
  Top Layer w8: U1.52 4206.54,3653.46 4220,3640 4220,3485 4308,3397 4308,3335.62 4337.75,3305.87 4337.75,3248.41 4392.1,3194.06 4392.1,3136.29 4464.22,3064.17 4483.8,3064.17 4525,3022.96 v1(4525,2590)
  Bottom Layer w8: U11.2 4507.28,2590 v1(4525,2590)
DVL_RX: U1.24 U4.1 U15.27 | length 2103.4
  Top Layer w8: U4.1 2560,2765 2595,2730 v1(3085,2730) ; v1(3480,3655) 3533.35,3655 U1.24
  Bottom Layer w8: v1(3085,2730) 3485,2730 3567.99,2812.99 U15.27 3567.99,2887.01 3414.96,3040.04 3414.96,3188.67 3469.31,3243.02 3469.31,3301.18 3470,3301.87 3470,3645 v1(3480,3655)
DVL_RX+: "DVL CONN.1" R18.1 U4.7 | length 477.9
  Top Layer w10: U4.7 2610,3040.09 2850.82,3280.91 2864.37,3280.91 2878.5,3295.04 R18.1
DVL_RX-: "DVL CONN.2" R18.2 U4.6 | length 558.5
  Top Layer w10: U4.6 2685.19,3036.3 2685.19,3065.28 2837.27,3217.36 2909.53,3217.36 2973.07,3280.91 2941.5,3312.48 R18.2
DVL_RX_BUF: LED10.A U15.22 | length 418.9
  Top Layer w8: LED10.A 3315,2740 3340,2715 3405,2715 3455,2665 3510,2665 v1(3570,2605)
  Bottom Layer w8: U15.22 3570,2557.4 v1(3570,2605)
DVL_TX: U1.23 U6.4 U15.29 | length 1760.1
  Top Layer w8: U6.4 3125,2728.7 v1(3125,2700) ; U1.23 3578.15,3673.15 v1(3595,3690)
  Bottom Layer w8: v1(3125,2700) 3555,2700 3607.36,2752.36 U15.29 3607.36,2892.64 3582.7,2917.3 3560.09,2917.3 3510.66,2966.73 3510.66,3195.66 3565,3250 3565,3660 v1(3595,3690)
DVL_TX+: "DVL CONN.3" R19.1 U6.7 | length 434.8
  Top Layer w10: U6.7 2930,3083.84 2966.99,3120.83 2966.99,3176.92 3007.43,3217.36 3018.23,3217.36 3081.77,3280.91 3098.5,3297.64 R19.1
DVL_TX-: "DVL CONN.4" R19.2 U6.6 | length 474.2
  Top Layer w10: U6.6 2980,3070.43 3030.39,3120.83 3047.41,3120.83 3087.85,3161.27 3087.85,3189.09 3116.13,3217.36 3126.93,3217.36 3190.47,3280.91 3161.5,3309.88 R19.2
DVL_TX_BUF: LED11.A U15.20 | length 586.2
  Top Layer w8: LED11.A 3225,2740 3370,2595 3515,2595 v1(3605,2505)
  Bottom Layer w8: v1(3605,2505) 3607.36,2507.36 U15.20
GND: "DVL CONN.36" "DVL CONN.37" C1.2 C2.2 C3.2 C4.2 C5.2 C6.2 C7.2 C8.2 C9.2 C10.2 C11.2 C12.2 C13.2 C14.2 C15.2 C16.2 C17.2 C18.2 C19.2 C20.2 C21.2 C22.2 C23.2 C26.2 C27.2 C29.2 C30.2 C31.2 C32.2 C33.2 P1.3 P3.3 P3.4 P3.5 P5.2 P7.3 P8.1 P8.2 P8.3 R2.2 R3.2 R4.2 R5.2 R6.2 R7.2 R8.2 R11.2 R12.2 R13.2 R14.2 R15.2 R16.2 R17.2 R30.2 R31.2 S1.B T1.2 U1.10 U1.27 U1.74 U1.99 U2.2 U3.5 U4.2 U4.3 U4.5 U5.2 U5.3 U5.5 U6.5 U7.5 U8.3 U9.4 U10.14 U11.4 U12.2 U13.2 U13.4 U15.GND | length 7434.3
  Top Layer w10: R30.2 2284.02,1956.5 P7.3 ; v2(2235,2360) C22.2 ; C14.2 2375.87,3786.38 2421.55,3832.06 2421.55,3870.64 S1.B@2622.74,4071.82 ; U9.4 2460,2273.7 v2(2460,2230) ; U4.2 U4.3 2660,2915 2710,2965 U4.5 ; C20.2 v2(2895,2315) ; U6.5 3076.3,3036.3 v2(3080,3040) ; v2(3070,4095) 3107.27,4057.73 C15.2 3112.73,3973.96 U2.2 ; v2(3215,3700) C11.2 ; C10.2 C11.2 ; C3.2 3338.5,3765 C11.2 ; v2(3385,3945) 3431.5,3945 C2.2 3447.44,3929.06 U1.10 ; v2(3425,2145) U7.5 ; v2(3425,4155) 3425,4096.5 C1.2 ; v2(3600,3405) 3603.5,3408.5 C4.2 3623.46,3484.96 U1.27 ; U1.99@3623.78,4175.12 3623.78,4252.28 C7.2 3646.5,4276.5 v2(3685,4315) ; U5.5 3760,2275 v1(3810,2325) ; R17.2 v2(3835,4275) ; U5.3 v1(3810,2325) ; U5.2 3860,2375 v1(3810,2325) ; v2(4000,3365) 4035,3400 C8.2 ; C26.2 4035,2483.5 v1(4035,2435) ; U1.74 4226.97,4086.54 C6.2 4273.5,4040 v2(4295,4040) 4316.5,4018.5 C9.2 ; v2(4165,3510) 4165,3466.5 C5.2 ; U10.14 4263.39,2101.61 4266.5,2098.5 4380,2098.5 4380,2023.7 P8.1 ; U8.3 4710.47,4203.5 C17.2 4807.01,4196.5 C16.2 4876.5,4195 v2(4940,4195) ; C18.2 v2(4810,4035) ; v2(5200,2190) 5200,2193.7 U3.5
  Top Layer w20: R12.2 R11.2 R13.2 R14.2 R8.2 R7.2 R6.2 R5.2 R4.2 R3.2 R2.2 R15.2 R16.2
  Top Layer w50: U12.2 5140.25,3931.13 C31.2 5196.5,3955.87 C30.2
  Bottom Layer w10: v2(2460,2230) 2543.5,2313.5 C19.2 ; v2(3550,2485) 3550,2493.25 3587.68,2530.93 U15.GND@3587.68,2555.39 ; v2@3575,2780 3587.68,2792.68 ; v2@3580,2775 3587.68,2782.68 3587.68,2792.68 ; C13.2 3585,2946.5 v2(3585,2990) ; U15.GND@3587.68,2854.61 3587.68,2792.68 ; C33.2 3663.5,2388.5 v2(3700,2425) 3700,2514.77 3699,2515.77 3705.79,2522.56 U15.GND@3705.79,2555.39 ; U15.GND@3705.79,2854.61 3705.79,2764.21 v2(3720,2750) ; v2(3790,2485) 3800.43,2495.43 U15.GND@3800.43,2540 ; v2(3790,2930) 3790,2904.8 3804.21,2890.59 U15.GND@3804.21,2854.61 ; v1(3810,2325) 3865,2380 C12.2 ; v2@3905,2805 3922.32,2822.32 U15.GND@3922.32,2854.61 ; U15.GND@3922.32,2555.39 3925,2552.72 v2@3925,2505 ; C32.2 3945,2963.5 v2(3945,3075) ; C23.2 4286.5,2430 v2(4385,2430) ; U11.4 4497.28,2500 v2(4555,2500)
  Bottom Layer w20: v2(4555,2500) 4580,2525 C27.2
  Bottom Layer w50: R31.2@4628.89,2933.89 4657.93,2962.93 4657.93,3169.09
  Bottom Layer w70: U13.4 U13.2 4640.55,3925.28 4640.55,3756.54 C29.2 4647.09,3637.91 v3(4655,3630)
  other v2: 3930,2505 3575,2775 3900,2800 2685,2940 4110,3020 3480,3025 2515,3964.09
IMU_NRST: P2.3 U1.1 | length 2730.1
  Top Layer w8: v1(3440,3530) 3237.74,3327.74 3237.74,3261.33 3190,3213.59 3190,2756.62 3364.62,2582 3509.62,2582 3580,2511.62 3580,2494.64 3667.48,2407.16 P2.3 ; v1(3485,4110) 3531.1,4110 U1.1
  Bottom Layer w8: v1(3440,3530) 3440,3650.36 3485,3695.36 3535.36,3695.36 3635,3795 3635,3960 v1(3485,4110)
IMU_RX: U1.97 U5.1 U15.32 | length 2204
  Top Layer w8: U1.97 3662.83,4139.69 3680,4122.52 v1(3680,4115) ; U5.1 3946.3,2426.3 v1(3970,2450) ; U5.1@3910,2456.3 U5.1@3916.3,2450
  Bottom Layer w8: v1(3680,4115) 3675,4110 3675,3820 3673.71,3818.71 3673.71,3262.49 3619.36,3208.14 3619.36,3144.13 3695,3068.49 3695,2940 3666.42,2911.42 U15.32 3666.42,2738.43 3715,2689.85 3960,2689.85 4024,2625.85 4024,2485.69 3988.31,2450 v1(3970,2450)
IMU_RX+: P2.1 R20.1 U5.7 | length 395.1
  Top Layer w10: R20.1 3811.5,1976.54 P2.1 3860,2025.04 U5.7@3860,2230
IMU_RX-: P2.2 R20.2 U5.6 | length 402.4
  Top Layer w10: R20.2 3748.5,1987.72 P2.2 3746.22,1997.47 3810,2061.25 U5.6@3810,2230
IMU_RX_BUF: LED13.A U15.17 | length 301.9
  Top Layer w8: LED13.A 3525,2760 3640,2645 3641.97,2645 3665,2621.97 v1(3665,2605)
  Bottom Layer w8: v1(3665,2605) 3665,2556.81 U15.17
IMU_TX: U1.98 U7.4 U15.30 | length 1908.8
  Top Layer w8: U7.4@3425,2456.3 3425,2525 v1(3435,2535) ; U1.98 3645,4173.27 v1(3645,4115)
  Bottom Layer w8: v1(3435,2535) 3627.05,2727.05 U15.30 3627.05,2913.34 3617.81,2922.57 3617.81,3055.36 3523.66,3149.52 3523.66,3188.67 3578.01,3243.02 3578.01,3328.17 3660,3410.17 3660,4085 3645,4100 v1(3645,4115)
IMU_TX+: P2.5 R21.1 U7.7 | length 366.4
  Top Layer w10: P2.5 3513.5,1986.5 R21.1 ; v1(3525,2150) U7.7
  Bottom Layer w10: P2.5 3525,2005 v1(3525,2150)
IMU_TX-: P2.4 R21.2 U7.6 | length 440.9
  Top Layer w10: U7.6@3475,2243.7 3475,2103.74 P2.4 3576.5,1977.76 R21.2
IMU_TX_BUF: LED12.A U15.19 | length 353.9
  Top Layer w8: LED12.A 3435,2740 3480,2695 3535,2695 v1(3625,2605)
  Bottom Layer w8: v1(3625,2605) 3625,2557.44 U15.19
INTER_PRES_INT1: U1.78 U8.6 | length 714
  Top Layer w10: v1(4035,4095) 4034,4096 4034,4172.27 U1.78 ; v1(4535,4200) 4554.61,4219.61 U8.6
  Bottom Layer w10: v1(4035,4095) 4281.21,4095 4386.21,4200 v1(4535,4200)
INTER_PRES_INT2: U1.77 U8.5 | length 666.8
  Top Layer w10: U1.77 4060,4171.65 v1(4060,4125) ; v1(4560,4265) 4611.81,4265 U8.5
  Bottom Layer w10: v1(4060,4125) 4290,4125 4425,4260 4555,4260 v1(4560,4265)
LED0: U1.57 U15.41 | length 1092.5
  Top Layer w8: v1(4045,3755) 4142.01,3755 U1.57
  Bottom Layer w8: U15.41 3843.58,2913.81 3834.82,2922.57 3834.82,2972.7 3835,2972.88 3835,3070 3849.76,3084.76 3849.76,3189.76 3904.11,3244.11 3904.11,3317.34 4032.5,3445.73 4032.5,3742.5 v1(4045,3755)
LED0_BUF: LED0.A U15.8 | length 380.7
  Top Layer w8: v1(3845,2605) 3851.26,2605 3902.26,2656 3976,2656 4065,2745 LED0.A
  Bottom Layer w8: U15.8 3845,2556.81 v1(3845,2605)
LED1: U1.56 U15.43 | length 1028.9
  Top Layer w8: v1(4060,3720) 4072.2,3732.2 U1.56
  Bottom Layer w8: U15.43 3887.73,2859.39 3887.73,2891.12 3893.31,2896.69 3893.31,3070.84 3944.3,3121.83 3944.3,3206.98 3998.65,3261.33 3998.65,3313.65 4060,3375 v1(4060,3720)
LED1_BUF: LED1.A U15.6 | length 543.1
  Top Layer w8: v1(3890,2505) 3880,2515 3880,2615.36 3907.64,2643 4042.85,2643 4155,2755.15 LED1.A
  Bottom Layer w8: U15.6 3887.73,2550.61 3887.73,2507.27 v1(3890,2505)
LED2: U1.55 U15.44 | length 1014.2
  Top Layer w8: v1(4090,3695) 4099.76,3695 4112.5,3707.74 4140.34,3707.74 U1.55
  Bottom Layer w8: U15.44 3902.64,2887.64 3925,2910 3945,2910 3985,2950 3985,3122.98 3958.46,3149.52 3958.46,3188.67 3986.15,3216.36 3986.36,3216.36 4012.81,3242.81 4012.81,3307.81 4090,3385 v1(4090,3695)
LED2_BUF: LED2.A U15.5 | length 508.4
  Top Layer w8: v1(3905,2605) 3905,2605.36 3929.64,2630 3950.36,2630 3955.36,2625 4043.23,2625 4109.23,2691 4196,2691 4245,2740 LED2.A
  Bottom Layer w8: U15.5 3905,2557.76 v1(3905,2605)
NetC8_1: C8.1 U1.49 | length 107.3
  Top Layer w10: C8.1 4056.53,3488.03 U1.49
NetC9_1: C9.1 U1.73 | length 144
  Top Layer w10: U1.73 4183.15,4066.85 4253.5,3996.5 C9.1
NetC18_1: C18.1 U8.2 | length 155.2
  Top Layer w10: C18.1 4683.5,4061.5 4665,4080 4665,4141.02 U8.2
NetC20_1: C20.1 R25.1 U9.6 U9.7 | length 272.7
  Top Layer w10: U9.6 2681.3,2315 C20.1 R25.1 2758.5,2375 U9.7
NetC22_1: C22.1 R28.1 U9.1 U9.2 | length 272.7
  Top Layer w10: U9.2 2376.5,2375 C22.1 R28.1 2366.5,2425 U9.1
NetC23_1: C23.1 U10.3 | length 185.5
  Top Layer w10: v1(4240,2310) 4263.39,2333.39 U10.3
  Bottom Layer w10: v1(4240,2310) 4265,2335 C23.1
NetC24_1: C24.1 U10.2 | length 95.3
  Top Layer w10: U10.2 4288.98,2467.48 C24.1
NetC24_2: C24.2 U10.4 | length 90.4
  Top Layer w10: U10.4 4237.8,2479.29 C24.2
NetC25_1: C25.1 U10.5 | length 161.6
  Top Layer w10: U10.5 4214.53,2399.25 4214.53,2454.38 4208.82,2460.09 4208.82,2509.91 4221.5,2522.59 C25.1
NetC25_2: C25.2 U10.6 | length 164.7
  Top Layer w10: C25.2 4158.5,2510.57 4184.29,2484.78 4184.29,2399.25 U10.6
NetC26_1: C26.1 U10.7 | length 134.4
  Top Layer w10: C26.1 4130,2485 4161.02,2453.98 U10.7
NetC28_1: C28.1 U11.8 | length 162.4
  Bottom Layer w20: C28.1@4150,2620 4150,2664.45 4150.55,2665 U11.8
NetC28_2: C28.2 U11.5 U11.6 | length 155.7
  Bottom Layer w20: C28.2 4263.27,2560.55 4263.27,2519.45 U11.5
NetLED0_C: LED0.C R4.1 | length 96
  Top Layer w10: LED0.C R4.1
NetLED1_C: LED1.C R3.1 | length 96
  Top Layer w10: LED1.C R3.1
NetLED2_C: LED2.C R2.1 | length 96
  Top Layer w10: LED2.C R2.1
NetLED4_C: LED4.C R5.1 | length 96
  Top Layer w10: LED4.C R5.1
NetLED5_C: LED5.C R6.1 | length 96
  Top Layer w10: LED5.C R6.1
NetLED6_C: LED6.C R7.1 | length 96
  Top Layer w10: LED6.C R7.1
NetLED7_C: LED7.C R8.1 | length 96
  Top Layer w10: LED7.C R8.1
NetLED10_C: LED10.C R11.1 | length 96
  Top Layer w10: LED10.C R11.1
NetLED11_C: LED11.C R12.1 | length 96
  Top Layer w10: LED11.C R12.1
NetLED12_C: LED12.C R13.1 | length 96
  Top Layer w10: LED12.C R13.1
NetLED13_C: LED13.C R14.1 | length 96
  Top Layer w10: LED13.C R14.1
NetLED14_C: LED14.C R15.1 | length 96
  Top Layer w10: LED14.C R15.1
NetLED15_C: LED15.C R16.1 | length 96
  Top Layer w10: LED15.C R16.1
NetN1_G: N1.G U11.7 | length 577.6
  Bottom Layer w20: U11.7 4325,2615 4415,2525 4415,2495 4450,2460 4615,2460 N1.G
NetR17_1: R17.1 U1.94 | length 100.6
  Top Layer w10: U1.94 3722.67,4175.9 3722.67,4274.16 R17.1
NetR26_2: R26.2 U9.5 | length 317
  Top Layer w10: U9.5 2671.3,2260.2 R26.2
NetR27_2: R27.2 R29.1 R30.1 | length 357.9
  Top Layer w10: R29.1 2218.5,2013.74 2187.31,1982.55 2187.31,1926.19 R30.1 2325,1893.5 R27.2
NetR29_2: R29.2 U9.3 | length 314.9
  Top Layer w10: R29.2 2281.5,2201.5 2405,2325 U9.3
NJTRST: P1.5 U1.90 | length 359.9
  Top Layer w10: v1(3800,4125) 3800,4174.49 U1.90
  Bottom Layer w10: v1(3800,4125) 3855,4125 P1.5
NRST: C14.1 R1.2 S1.A U1.14 | length 1444.1
  Top Layer w10: C14.1 2498.84,3659.75 2557.26,3718.18 2758.45,3919.36 S1.A@2758.45,3957.94 ; R1.2 2834.75,4034.25 S1.A@2758.45,3957.94 ; U1.14 3484.79,3850.32 3456.92,3822.44 2893.95,3822.44 S1.A@2758.45,3957.94
PRESSURE: R28.2 U1.15 | length 2338.3
  Top Layer w8: R28.2 2298.5,2483.5 v1(2310,2495) ; U1.15 3585.63,3830.63 v1(3605,3850)
  Bottom Layer w8: v1(2310,2495) 2330,2515 2811.62,2515 3184.56,2887.94 3184.56,3194.06 3238.91,3248.41 3238.91,3486.03 3474.23,3721.36 3502.97,3721.36 3580,3798.38 3580,3815.36 3605,3840.36 v1(3605,3850)
PRESSURE_IN: P7.2 R27.1 | length 95.1
  Top Layer w10: P7.2 2391.5,1984.76 R27.1
RAIL: C27.1 C30.1 N1.D T1.1 U11.1 U12.1 | length 2052.2
  Top Layer w70: U12.1 U12.1@5135,3802.45 ; U12.1@5140,3797.45 C30.1@5271.83,3929.28
  Bottom Layer w20: U11.1 4554.45,2665 C27.1 4694.45,2639.45 N1.D
  Bottom Layer w50: N1.D 4920,2665 5275,3020 T1.1
  Bottom Layer w70: U12.1 5135,3585 5165,3555 T1.1
SCL: R22.2 U1.92 U8.8 | length 1051.2
  Top Layer w10: U1.92 3761.26,4206.26 3775,4220 4295,4220 4340,4175 4340,4080 4375,4045 4413.5,4045 R22.2 4615.31,4121.5 U8.8
SDA: R23.2 U1.93 U8.7 | length 947
  Top Layer w10: U1.93 3741.57,4211.57 3765,4235 4321.5,4235 R23.2 4614.53,4171.5 U8.7
SWCLK: P1.2 U1.76 | length 343.7
  Top Layer w10: U1.76 4091.34,4160 v1(4105,4160)
  Bottom Layer w10: v1(4105,4160) 4109,4164 4150.77,4164 4166,4179.23 4166,4211 4200,4245 4275,4245 P1.2
SWDIO: P1.4 U1.72 | length 322.4
  Top Layer w10: v1(4140,4190) 4140,4155 4090,4105 4090,4070 4112.83,4047.17 U1.72
  Bottom Layer w10: P1.4 4140,4300 v1(4140,4190)
TEMPERATURE: R25.2 U1.16 | length 1843.6
  Top Layer w8: R25.2 2855,2385 v1(2890,2420) ; U1.16 3599.06,3810.94 v1(3605,3805)
  Bottom Layer w8: v1(2890,2420) 2890,2575 3197.56,2882.56 3197.56,3188.67 3251.91,3243.02 3251.91,3480.65 3479.62,3708.36 3508.36,3708.36 v1(3605,3805)
TEMPERATURE_IN: P5.1 R24.2 R26.1 | length 213.3
  Top Layer w10: R24.2 2785,1881.5 P5.1 2878.5,1990 R26.1
UART1_RX: P4.2 U1.48 U15.38 | length 2414.8
  Top Layer w8: v1(3935,3500) 3966.11,3500 3978.61,3487.5 4001.39,3487.5 4032.07,3518.18 4032.07,3560.1 U1.48
  Bottom Layer w8: v1(3935,3500) 3935,3385 3878.17,3328.17 3823.1,3328.17 3795.41,3300.48 3795.41,3245.41 3741.06,3191.06 3741.06,3149.52 3784.53,3106.05 3784.53,2990 3760,2965.47 3760,2915 3784.53,2890.47 U15.38 3789.31,2849.83 3789.31,2826.78 3867.09,2749 3956,2749 4063.31,2641.69 4063.31,2501.54 4176,2388.85 4176,2283.49 4233.49,2226 4550,2226 4636.26,2139.74 P4.2
UART1_RX_BUF: LED4.A U15.11 | length 308.8
  Top Layer w8: v1(3845,2640) 3945,2740 LED4.A
  Bottom Layer w8: U15.11 3784.53,2579.88 3844.64,2640 v1(3845,2640)
UART1_TX: P4.1 U1.47 U15.40 | length 2291.8
  Top Layer w8: v1(3990,3515) 4017.16,3542.16 U1.47
  Bottom Layer w8: v1(3990,3515) 3990,3421.62 3891.11,3322.73 3891.11,3251.11 3835.59,3195.59 3835.59,3088.98 3821.82,3075.2 3821.82,2854.61 U15.40 3828.68,2849.83 3828.68,2821.32 3885,2765 3960,2765 4080,2645 4080,2503.23 4189,2394.23 4189,2288.88 4238.88,2239 4616,2239 4715,2140 P4.1
UART1_TX_BUF: LED5.A U15.9 | length 369.9
  Top Layer w8: v1(3825,2500) 3820,2505 3820,2695 3855,2730 LED5.A
  Bottom Layer w8: U15.9 3825,2554.29 v1(3825,2500)
pads on no net: "DVL CONN.0" "DVL CONN.5" "DVL CONN.6" "DVL CONN.7" "DVL CONN.8" "DVL CONN.9" "DVL CONN.10" "DVL CONN.11" "DVL CONN.12" "DVL CONN.13" "DVL CONN.14" "DVL CONN.15" "DVL CONN.16" "DVL CONN.17" "DVL CONN.18" "DVL CONN.19" "DVL CONN.20" "DVL CONN.21" "DVL CONN.22" "DVL CONN.23" "DVL CONN.24" "DVL CONN.25" "DVL CONN.26" "DVL CONN.27" "DVL CONN.28" "DVL CONN.29" "DVL CONN.30" "DVL CONN.31" "DVL CONN.32" "DVL CONN.33" P1.6 U1.2 U1.3 U1.4 U1.5 U1.7 U1.8 U1.9 U1.13 U1.17 U1.18 U1.20 U1.25 U1.26 U1.29 U1.30 U1.31 U1.32 U1.34 U1.35 U1.36 U1.37 U1.40 U1.41 U1.42 U1.43 U1.44 U1.45 U1.46 U1.53 U1.54 U1.58 U1.59 U1.60 U1.61 U1.62 U1.63 U1.64 U1.65 U1.66 U1.70 U1.71 U1.79 U1.80 U1.81 U1.82 U1.83 U1.84 U1.85 U1.86 U1.87 U1.88 U1.89 U1.91 U1.95 U1.96 U2.1 U4.4 U5.4 U6.1 U7.1 U10.10 U10.12 U11.3 U15.12 U15.13 U15.23 U15.26 U15.36 U15.37
copper on no net:
  other v4: 5275,3655 5375,3655

## Polygon pours and split planes (outlines as drawn)
GND on Internal Plane 1 (split plane): 5549.37,3687.74 5549.37,1675.15 2129.57,1675.15 2129.57,3687.74 2686.35,4351.95 4992.59,4351.95
3V3 on Internal Plane 2 (split plane): 5549.37,3687.74 5549.37,1675.15 2129.57,1675.15 2129.57,3687.74 2686.35,4351.95 4992.59,4351.95

## Keep-outs
Keep-Out Layer:
  lines w0.5: 2079.47,1655.05 2688.47,1655.05 ; 2109.47,1655.05 2109.47,3695.05 2676.97,4372.05 5001.97,4372.05 5569.47,3695.05 5569.47,1655.05 4960.47,1655.05

## Silkscreen, mask and mechanical layers (free items; w line width, h text height)
Top Overlay:
  text "TX" at 3190,2705 h40
  text "RX" at 3285,2705 h40
  text "TX" at 3400,2705 h40
  text "RX" at 3495,2705 h40
  text "TX" at 3610,2705 h40
  text "RX" at 3705,2705 h40
  text "TX" at 3820,2705 h40
  text "RX" at 3915,2705 h40
  text "0" at 4050,2705 h40
  text "1" at 4150,2705 h40
  text "2" at 4230,2705 h40
  text "TX" at 4330,2705 h40
  text "RX" at 4425,2705 h40
  text "DVL" at 3220,2635 h40
  text "IMU" at 3430,2635 h40
  text "CMPSS" at 3595,2635 h40
  text "U1" at 3870,2635 h40
  text "LED" at 4100,2635 h40
  text "OUT" at 4360,2635 h40
  text "G" at 2285,2045 h30
  text "PRES" at 2340,2045 h30
  text "5" at 2480,2045 h30
  text "G" at 2695,2045 h30
  text "TEMP" at 2740,2045 h30
  text "G" at 2990,2045 h30
  text "G" at 3070,2045 h30
  text "G" at 3145,2045 h30
  text "5" at 3225,2045 h30
  text "5" at 3305,2045 h30
  text "T+" at 3485,2045 h30
  text "T-" at 3565,2045 h30
  text "RST" at 3630,2045 h30
  text "R-" at 3725,2045 h30
  text "R+" at 3795,2045 h30
  text "5" at 4010,2045 h30
  text "T" at 4090,2045 h30
  text "R" at 4170,2045 h30
  text "G" at 4245,2045 h30
  text "G" at 4325,2045 h30
  text "G" at 4405,2045 h30
  text "RX" at 4610,2045 h30
  text "TX" at 4690,2045 h30
  text "B" at 4950,2045 h30
  text "A" at 5030,2045 h30
  text "B" at 5275,2045 h30
  text "A" at 5355,2045 h30
  text "PRES" at 2285,1670 h60
  text "TEMP" at 2640,1670 h60
  text "IMU PWR" at 2955,1670 h60
  text "IMU DATA" at 3435,1670 h60
  text "COMPASS" at 4015,1670 h60
  text "U1" at 4650,1670 h60
  text "OUTPUT" at 4995,1670 h60
Bottom Overlay:
  circle w10: c2592.78,3225 r111.34
  circle w10: c5092.78,3225 r111.34
  lines w7: 2728.67,3357.61 cw(c2776.97,3370.55) 2776.97,3420.55 4901.97,3420.55 cw(c4901.97,3370.55) 4950.27,3357.61 4875.24,3077.61 cw(c4826.94,3090.55) 4826.94,3040.55 2852,3040.55 cw(c2852,3090.55) 2803.7,3077.61 2728.67,3357.61
  text "Nav Board" at 3250,4285 h60
  text "JUN 2015 R2" at 3305,4200 h60
  text "SUB 8 - Tycoon" at 3395,4115 h60
  text "Matthew Griessler" at 3450,4030 h60
  text "IMU PWR" at 3350,2115 h60
  text "PRES" at 2500,2110 h60
  text "TEMP" at 2855,2110 h60
  text "IMU DATA" at 3895,2110 h60
  text "COMPASS" at 4415,2100 h60
  text "OUTPUT" at 5320,2090 h60

## Text inside footprints (layer, text, board x,y; h text height)
"DVL CONN": Bottom Overlay "1" at 2873,3357 h59.06; Bottom Overlay "37" at 4816,3029 h59.06